# EAGLE board QRE1113_breakout_schmitt (EAGLE 6.3)
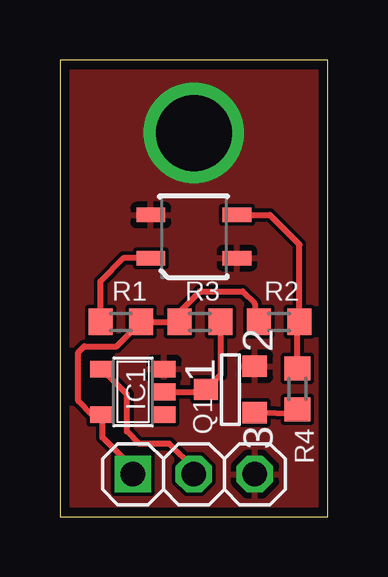
[diagram p0: board, top side]
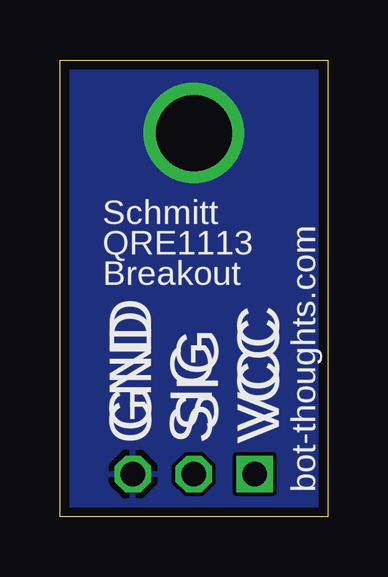
[diagram p1: board, bottom side, seen from below]

Size 11.18 x 19.05 mm. Coordinates in mm from the lower left corner, seen from the top.
Outline: 0,0 11.18,0 11.18,19.05 0,19.05 0,0
Copper layers (1*16): Top 0.0356mm / dielectric 1.5011mm / Bottom 0.0356mm
Design rules "LaenPCBOrder *": minimum track width 6mil, minimum drill 13mil, track to track 6mil, track to pad 6mil, pad to pad 6mil, via to via 6mil, smd to smd 6mil, copper to edge 15mil, drill to drill 6mil, minimum pad ring 7mil, minimum via ring 7mil, stop-mask expansion 4mil, vias tented up to drill 21mil, thermal gap 10mil

## Footprints (pad centres in the part's own frame; a part is rotated, then mirrored left to right if it is on the bottom)
SOT23-5 = smd 0.69 x 0.99: 1 -0.95,-1.29; 2 0,-1.29; 3 0.95,-1.29; 4 0.95,1.3; 5 -0.95,1.3
QRE1113 = smd 1.2 x 0.6: 1 -1.8,-0.9; 2 1.8,-0.9; 3 1.8,0.9; 4 -1.8,0.9
1X03-S = drill 1.016 square: 1 -2.54,0 | drill 1.016 octagon: 2 0,0; 3 2.54,0
SOT-23 = smd 0.889 x 1.016: 1 0.025,-1.016; 2 -0.94,1.016; 3 0.991,1.016
R0603 = smd 1 x 1.1: 1 -0.85,0; 2 0.85,0

## Placement (x,y rotation side)
IC1  74AUC1G17DBV  [SOT23-5]  3.05,5.21 90 top
IC2  QRE1113  [QRE1113]  5.59,11.68 0 top
JP1  [1X03-S]  5.59,1.78 0 top
Q1  2N3904  [SOT-23]  7.11,5.33 270 top
R1  100  [R0603]  2.54,8.13 0 top
R2  2.2k  [R0603]  9.14,8.13 180 top
R3  2.2k  [R0603]  5.84,8.13 180 top
R4  100  [R0603]  9.91,5.33 270 top

## Library data of the parts
IC1 = 74xx-little-us
IC2 = SparkFun
JP1 = pinhead-2
Q1 = mes_transistors
R1-R4 = rcl

## Nets
GND: IC1.3 IC2.2 IC2.4 JP1.3 Q1.2
N$1: IC2.3 R2.1 R4.1
N$2: IC2.1 R1.1
N$3: IC1.4 JP1.2
N$4: IC1.2 Q1.1 R3.1
N$5: Q1.3 R4.2
VCC: IC1.5 JP1.1 R1.2 R2.2 R3.2

## Tracks (layer width: path | path; a pad name or v marks a point on that pad's centre or on a via)
GND  (via drill 3.17)
  other vias: 5.59,16
  pour Top: 0.51,19.05 10.67,19.05 10.67,0 0.51,0
  pour Bottom: 0,19.05 11.43,19.05 11.43,0 0,0
N$1
  Top 0.254: R4.1 9.91,8.04 R2.1 9.99,11.34 8.75,12.58 IC2.3
N$2
  Top 0.254: R1.1 1.69,9.82 2.66,10.78 IC2.1
N$3
  Top 0.254: JP1.2 5.59,2.03 4.57,3.05 3.3,3.05 2.79,3.56 2.79,5.11 IC1.4
N$4
  Top 0.254: IC1.2 5.99,5.21 Q1.1 6.69,5.91 R3.1
N$5
  Top 0.254: Q1.3 8.36,4.34 9.65,4.32 9.91,4.41 R4.2
VCC
  Top 0.254: JP1.1 3.05,2.03 1.78,3.3 1.78,4.23 IC1.5 1.33,4.26 0.76,4.83 0.76,6.86 1.02,7.11 2.37,7.11 R1.2 R3.2 4.99,8.55 5.84,9.4 7.62,9.4 8.13,8.89 8.13,8.29 R2.2

## Text on the board
bNames: Schmitt | QRE1113 | Breakout | VCC | SIG | GND | VCC | SIG | GND | bot-thoughts.com